# EAGLE board schematic (EAGLE 6.6.0)

Size 100 x 80 mm. Coordinates in mm from the lower left corner, seen from the top.
Outline: 0,0 100,0 100,80 0,80 0,0
Copper layers (1*16): Top 0.035mm / dielectric 1.5mm / Bottom 0.035mm
Design rules "default": minimum track width 10mil, minimum drill 24mil, track to track 8mil, track to pad 8mil, pad to pad 8mil, via to via 8mil, smd to smd 8mil, copper to edge 40mil, drill to drill 8mil, minimum pad ring 10mil, minimum via ring 8mil, stop-mask expansion 4mil, vias tented up to drill 0mil, thermal gap 10mil
Net classes: 0 default: width 0.203 mm, drill 0.6 mm, clearance 0.203 mm; 1 power: width 0.305 mm, drill 0.6 mm, clearance 0.254 mm; 2 gnd: width 0.254 mm, drill 0.6 mm, clearance 0.254 mm

## Footprints (pad centres in the part's own frame; a part is rotated, then mirrored left to right if it is on the bottom)
POWER_JACK_PTH_LOCK = drill 2.997 pad 4.115: GND 0.025,6.557; GNDBREAK 3.762,10.7 | drill 3.2 pad 4.115: PWR 0,13.878
1X04-3.5MM = drill 1 pad 2.184: 1 -5.25,0; 2 -1.75,0; 3 1.75,0; 4 5.25,0
PAD-01 = drill 1.321 pad 2.54 octagon: 1 0,0
E2,5-6E = drill 0.813 pad 1.575: + -1.27,0 | drill 0.813 pad 1.575 octagon: - 1.27,0
STX3100 = drill 1.5 pad 2.54: 1 2.7,-0.1 | drill 1.5: 2 7.7,5; 3 7.7,2.3; 4 7.7,-2.5; 5 7.7,-5.2 | hole 1.5: 2.7,4.9; 2.7,-5.1; 7.7,-0.1
DIL08 = drill 0.813 pad 1.27: 1 -3.81,-3.81; 2 -1.27,-3.81; 3 1.27,-3.81; 4 3.81,-3.81; 5 3.81,3.81; 6 1.27,3.81; 7 -1.27,3.81; 8 -3.81,3.81
2X03 = drill 1.016 octagon: 1 -2.54,-1.27; 2 -2.54,1.27; 3 0,-1.27; 4 0,1.27; 5 2.54,-1.27; 6 2.54,1.27
LED3MM = drill 0.813 pad 1.676 octagon: A -1.27,0; K 1.27,0
JEELABS_1,6/0,8 = drill 0.9 pad 1.6 octagon: 1 0,0
0204/7 = drill 0.813 octagon: 1 -3.81,0; 2 3.81,0
SJ_3 = smd 0.635 x 1.27: 1 -0.889,0; 2 0,0; 3 0.889,0
FIDUCIAL_1MM = smd 1 x 1: 1 0,0
ARDUINO-BPLACE = drill 1 pad 1.676 octagon: 3V 35.56,2.54; 5V 38.1,2.54; A0 50.8,2.54; A1 53.34,2.54; A2 55.88,2.54; A3 58.42,2.54; A4 60.96,2.54; A5 63.5,2.54; AREF 23.876,50.8; D0 63.5,50.8; D1 60.96,50.8; D2 58.42,50.8; D3 55.88,50.8; D4 53.34,50.8; D5 50.8,50.8; D6 48.26,50.8; D7 45.72,50.8; D8 41.656,50.8; D9 39.116,50.8; D10 36.576,50.8; D11 34.036,50.8; D12 31.496,50.8; D13 28.956,50.8; GND 26.416,50.8; GND1 43.18,2.54; GND2 40.64,2.54; RESET 33.02,2.54; VIN 45.72,2.54 | hole 3.2: 15.24,50.8; 66.04,35.56; 13.97,2.54
RFM12B = smd 2.54 x 1.27: ANT 8,-6; FFS -8,2; GND 8,-2; IRQ -8,4; P$8 -8,0; P$9 -8,-2; P$10 -8,-4; P$12 -8,-6; P$16 8,0; SCK 8,4; SDI 8,2; SDO -8,6; SEL 8,6; VDD 8,-4

## Placement (x,y rotation side)
AC9V  POWER_JACKPTH_LOCK  [POWER_JACK_PTH_LOCK]  74.93,78.74 180 top
ANEMO1  1X4-3.5MM  [1X04-3.5MM]  7.62,68.58 270 top
ANEMO2  1X4-3.5MM  [1X04-3.5MM]  7.62,53.34 270 top
ANT1  [PAD-01]  95.25,41.91 0 top
C1  10µ  [E2,5-6E]  36.83,35.56 180 top
C2  0.1µ  [E2,5-6E]  69.85,35.56 270 top
C4  0.1u  [E2,5-6E]  58.42,38.1 90 top
C5  0.1u  [E2,5-6E]  52.07,38.1 90 top
C8  10µ  [E2,5-6E]  66.04,63.5 270 top
C10  10µ  [E2,5-6E]  80.01,45.72 180 top
CT1  STEREOJACK  [STX3100]  93.98,58.42 180 top
CT2  STEREOJACK  [STX3100]  93.98,71.12 180 top
IC1  LM358N  [DIL08]  26.67,36.83 0 top
IC2  LM358N  [DIL08]  26.67,49.53 0 top
ICSP  3x2F - BOTTOM  [2X03]  39.37,50.8 0 top
LED  [LED3MM]  59.69,63.5 270 top
PAD1  [JEELABS_1,6/0,8]  20.32,17.78 0 top
PAD2  [JEELABS_1,6/0,8]  10.16,17.78 0 top
R1  470K  [0204/7]  63.5,50.8 90 top
R2  470K  [0204/7]  74.93,58.42 270 top
R3  33R  [0204/7]  88.9,49.53 0 top
R4  470K  [0204/7]  80.01,58.42 270 top
R5  33R  [0204/7]  46.99,30.48 0 top
R6  470K  [0204/7]  66.04,50.8 90 top
R7  10k  [0204/7]  72.39,50.8 270 top
R8  4k7  [0204/7]  38.1,66.04 90 top
R9  10k  [0204/7]  52.07,62.23 180 top
R10  470R  [0204/7]  52.07,64.77 180 top
R11  470K  [0204/7]  68.58,50.8 90 top
R12  470K  [0204/7]  64.77,43.18 0 top
R13  100K  [0204/7]  64.77,40.64 0 top
R14  10K  [0204/7]  77.47,58.42 90 top
R15  33R  [0204/7]  88.9,46.99 0 top
R16  33R  [0204/7]  46.99,33.02 0 top
R17  10k  [0204/7]  17.78,49.53 90 top
R18  4k7  [0204/7]  44.45,39.37 90 top
R19  10k  [0204/7]  46.99,39.37 270 top
R20  4k7  [0204/7]  33.02,66.04 90 top
R21  10k  [0204/7]  25.4,29.21 180 top
R22  10k  [0204/7]  17.78,62.23 270 top
R23  10k  [0204/7]  -17.78,95.25 0 top  (outside the outline)
R25  10k  [0204/7]  -27.94,95.25 0 top  (outside the outline)
R26  100k  [0204/7]  52.07,57.15 180 top
R27  1M  [0204/7]  25.4,62.23 90 top
R28  10k  [0204/7]  22.86,62.23 90 top
R29  12k  [0204/7]  20.32,62.23 90 top
R30  100k  [0204/7]  20.32,49.53 90 top
R31  10k  [0204/7]  15.24,49.53 270 top
R32  10k  [0204/7]  -17.78,99.06 0 top  (outside the outline)
R33  100k  [0204/7]  -27.94,99.06 0 top  (outside the outline)
R34  10k  [0204/7]  -38.1,99.06 0 top  (outside the outline)
R35  100k  [0204/7]  -48.26,99.06 0 top  (outside the outline)
R36  1M  [0204/7]  16.51,11.43 0 top
R37  10k  [0204/7]  12.7,36.83 270 top
R38  12k  [0204/7]  15.24,36.83 270 top
R39  100k  [0204/7]  17.78,36.83 90 top
R40  10k  [0204/7]  -17.78,102.87 0 top  (outside the outline)
R41  10k  [0204/7]  -27.94,102.87 0 top  (outside the outline)
R42  100k  [0204/7]  -38.1,102.87 0 top  (outside the outline)
SJ1  [SJ_3]  44.45,68.58 0 top
SJ2  [SJ_3]  6.35,27.94 0 top
U$1  FIDUCIAL  [FIDUCIAL_1MM]  49.53,6.35 0 top
U$2  ARDUINO-BPLACE  [ARDUINO-BPLACE]  3.81,22.86 0 top
U$3  FIDUCIAL  [FIDUCIAL_1MM]  33.02,11.43 0 top
U$4  RFM12B  [RFM12B]  86.36,31.75 180 top
WINDVANE  1X4-3.5MM  [1X04-3.5MM]  7.62,38.1 270 top

## Library data of the parts
AC9V SJ1 SJ2 = SparkFun
ANEMO1 ANEMO2 CT1 CT2 LED U$1-U$3 WINDVANE = adafruit
ANT1 = discrete
C1 C2 C4 C5 C8 C10 R1-R23 R25-R42 = rcl
IC1 IC2 = linear
ICSP = pinhead
PAD1 PAD2 = jeenodes
U$4 = JeeParts

## Nets
3.3V [power]: C2.+ U$2.3V U$4.VDD
+5V [power]: IC1.8 IC2.8 ICSP.2 R4.2 R6.2 R11.2 R17.2 R22.2 R23.2 R26.1 R35.1 U$2.5V
ADC0: R13.2 R14.1 U$2.A0
ADC1: CT1.1 R5.2 R16.2 U$2.A1
ADC2: CT2.1 R3.2 R15.2 U$2.A2
ADC3: U$2.A3 WINDVANE.2
ADC4: U$2.A4
ADC5: U$2.A5
ANEMO1A: ANEMO1.1 R31.1
ANEMO1B: ANEMO1.2 R32.1
ANEMO2: ANEMO2.3 IC1.7 R23.1 R36.2 SJ2.1
ANEMO2A: ANEMO2.1 R40.1
ANEMO2B: ANEMO2.2 R41.1
AREF: U$2.AREF
DIG2: SJ2.2 U$2.D2
DIG3: ANEMO1.3 IC2.7 R22.1 R27.2 U$2.D3
DIG4: U$2.D4
DIG5: SJ1.3 U$2.D5
DIG6: U$2.D6
DIG7: U$2.D7
DIG8: U$2.D8
DIG9: R10.2 U$2.D9
DIG10: SJ1.1 U$2.D10
GND [gnd]: ANEMO1.4 ANEMO2.4 C1.- C2.- C4.- C5.- C8.- C10.- CT1.4 CT2.4 IC1.4 IC2.4 ICSP.6 LED.K R1.2 R2.2 R7.1 R9.1 R12.1 R19.1 R21.1 R25.2 R33.2 R34.2 R42.2 U$2.GND U$2.GND1 U$2.GND2 U$4.GND WINDVANE.4
MISO: ICSP.1 U$2.D12 U$4.SDO
MOSI: ICSP.4 R8.2 U$2.D11
N$1: PAD2.1 SJ2.3 U$4.IRQ
N$2: PAD1.1 R18.2 SJ1.2
N$3: R17.1 WINDVANE.1
N$4: R21.2 WINDVANE.3
N$5: AC9V.PWR R13.1
N$6: IC2.3 R31.2 R33.1
N$7: IC2.2 R30.1 R32.2
N$9: IC2.1 R29.1 R30.2
N$10: C4.+ R28.2 R29.2
N$11: IC2.6 R28.1
N$12: IC2.5 R25.1 R26.2 R27.1
N$14: IC1.3 R40.2 R42.1
N$16: IC1.2 R39.1 R41.2
N$18: IC1.1 R38.1 R39.2
N$19: C5.+ R37.2 R38.2
N$20: IC1.5 R37.1
N$21: IC1.6 R34.1 R35.2 R36.1
N$33: C8.+ CT2.5 R2.1 R3.1 R4.1 R15.1
N$34: AC9V.GND C10.+ R11.1 R12.2 R14.2
N$38: C1.+ CT1.5 R1.1 R5.1 R6.1 R16.1
N$41: LED.A R10.1
N$42: ANT1.1 U$4.ANT
N$43: R7.2 R20.1 U$4.SCK
N$44: R8.1 R9.2 U$4.SDI
N$45: R18.1 R19.2 U$4.SEL
RST: U$2.RESET
RX: U$2.D0
SCK: ICSP.3 R20.2 U$2.D13
TX: U$2.D1
VIN: U$2.VIN

## Tracks (layer width: path | path; a pad name or v marks a point on that pad's centre or on a via)
3.3V  (2 unrouted)
+5V  (11 unrouted)
ADC0  (2 unrouted)
ADC1  (3 unrouted)
ADC2  (3 unrouted)
ADC3  (1 unrouted)
ANEMO1A  (1 unrouted)
ANEMO1B  (1 unrouted)
ANEMO2  (4 unrouted)
ANEMO2A  (1 unrouted)
ANEMO2B  (1 unrouted)
DIG2  (1 unrouted)
DIG3  (4 unrouted)
DIG5  (1 unrouted)
DIG9  (1 unrouted)
DIG10  (1 unrouted)
GND  (29 unrouted)
MISO  (2 unrouted)
MOSI  (2 unrouted)
N$1  (2 unrouted)
N$2  (2 unrouted)
N$3  (1 unrouted)
N$4  (1 unrouted)
N$5  (1 unrouted)
N$6  (2 unrouted)
N$7  (2 unrouted)
N$9  (2 unrouted)
N$10  (2 unrouted)
N$11  (1 unrouted)
N$12  (3 unrouted)
N$14  (2 unrouted)
N$16  (2 unrouted)
N$18  (2 unrouted)
N$19  (2 unrouted)
N$20  (1 unrouted)
N$21  (3 unrouted)
N$33  (5 unrouted)
N$34  (4 unrouted)
N$38  (5 unrouted)
N$41  (1 unrouted)
N$42  (1 unrouted)
N$43  (2 unrouted)
N$44  (2 unrouted)
N$45  (2 unrouted)
SCK  (2 unrouted)